# EAGLE board I2C_nRF (EAGLE 8.5.2)
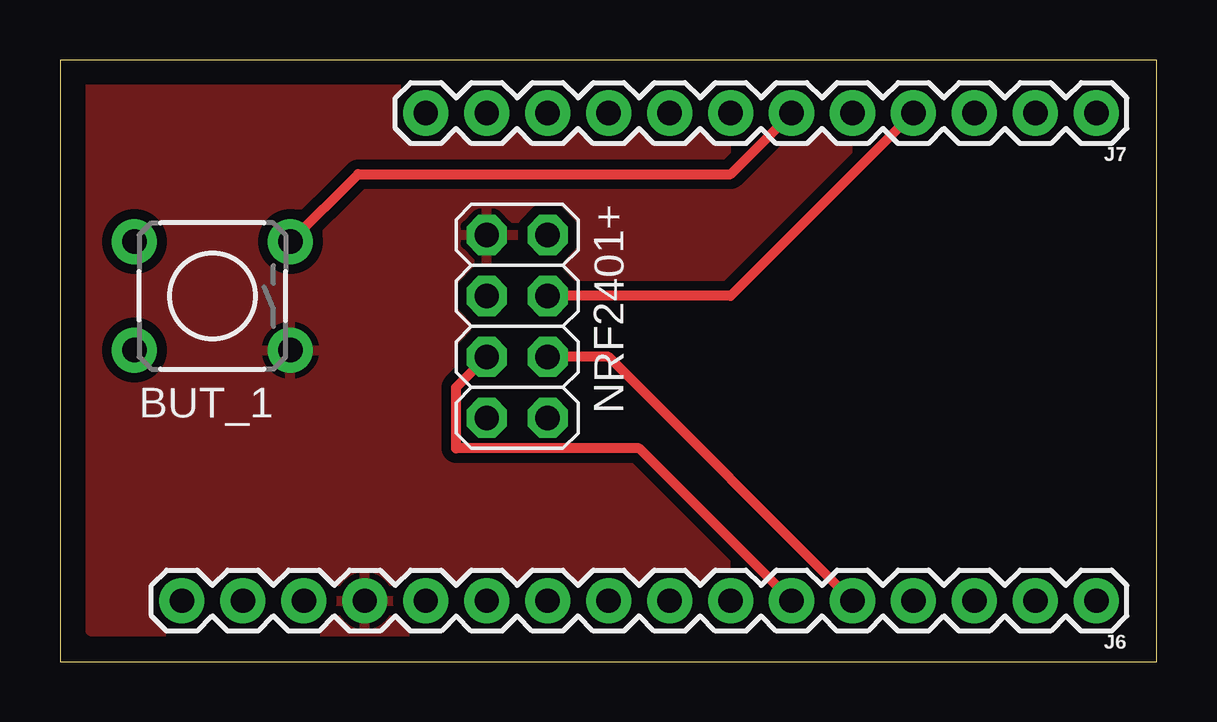
[diagram p0: board, top side]
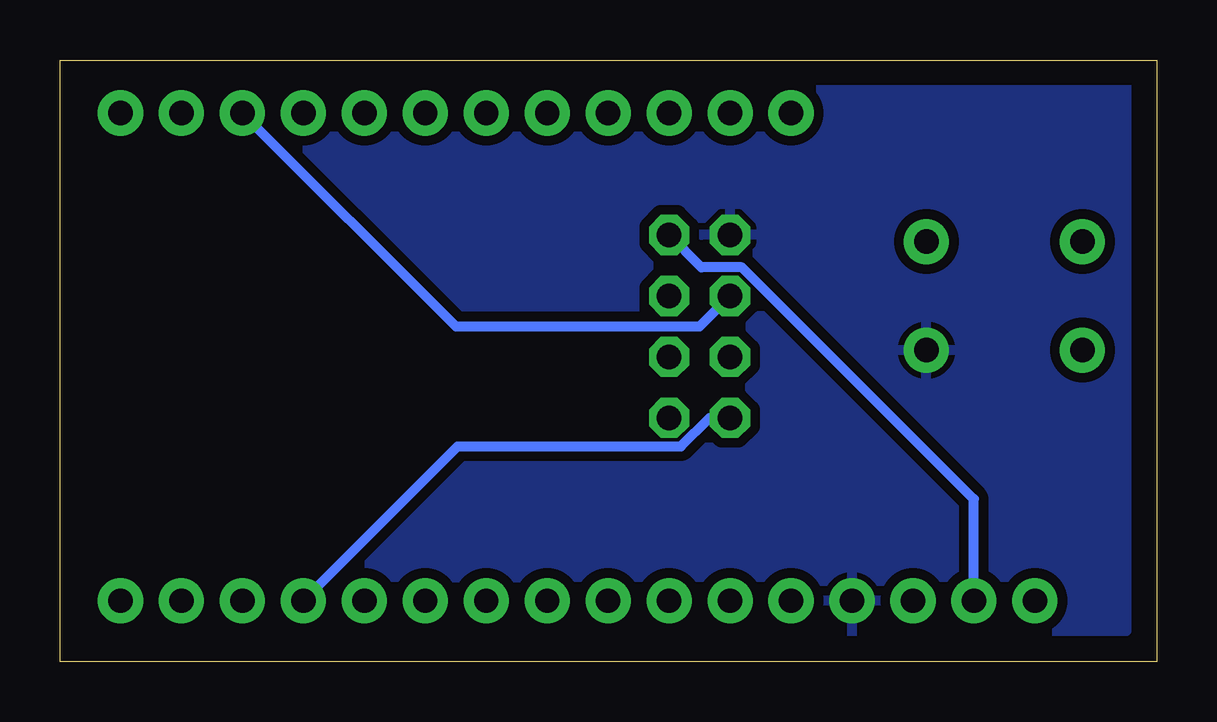
[diagram p1: board, bottom side, seen from below]

Size 45.7 x 25.07 mm. Coordinates in mm from the lower left corner, seen from the top.
Outline: 0,0 45.7,0 45.7,25.07 0,25.07 0,0
Copper layers (1*16): Top 0.035mm / dielectric 1.5mm / Bottom 0.035mm
Design rules "default": minimum track width 6mil, minimum drill 0.35mm, track to track 6mil, track to pad 6mil, pad to pad 6mil, via to via 6mil, smd to smd 6mil, copper to edge 40mil, drill to drill 6mil, minimum pad ring 10mil, minimum via ring 8mil, stop-mask expansion 4mil, vias tented up to drill 0mil, thermal gap 10mil
Net classes: 0 default: width 0.406 mm; 1 GND: width 0.61 mm

## Footprints (pad centres in the part's own frame; a part is rotated, then mirrored left to right if it is on the bottom)
TACTILE-PTH = drill 1.016 pad 1.88: 1 -3.251,2.261; 2 3.251,2.261; 3 -3.251,-2.261; 4 3.251,-2.261
1X16 = drill 1.016 pad 1.88: 1 0,0; 2 2.54,0; 3 5.08,0; 4 7.62,0; 5 10.16,0; 6 12.7,0; 7 15.24,0; 8 17.78,0; 9 20.32,0; 10 22.86,0; 11 25.4,0; 12 27.94,0; 13 30.48,0; 14 33.02,0; 15 35.56,0; 16 38.1,0
1X12 = drill 1.016 pad 1.88: 1 0,0; 2 2.54,0; 3 5.08,0; 4 7.62,0; 5 10.16,0; 6 12.7,0; 7 15.24,0; 8 17.78,0; 9 20.32,0; 10 22.86,0; 11 25.4,0; 12 27.94,0
2X04 = drill 1.016 pad 1.676 octagon: 1 -3.81,-1.27; 2 -3.81,1.27; 3 -1.27,-1.27; 4 -1.27,1.27; 5 1.27,-1.27; 6 1.27,1.27; 7 3.81,-1.27; 8 3.81,1.27

## Placement (x,y rotation side)
BUT_1  [TACTILE-PTH]  6.35,15.24 180 top
FRAME1  FRAME-LETTER  [CREATIVE_COMMONS]  -91.44,8.89 0 top  (outside the outline)
J6  [1X16]  43.18,2.54 180 top
J7  [1X12]  43.18,22.86 180 top
NRF2401+  [2X04]  19.05,13.97 270 top

## Library data of the parts
BUT_1 = SparkFun-Retired
FRAME1 = SparkFun-Aesthetics
J6 J7 = SparkFun-Connectors
NRF2401+ = adafruit

## Nets
A0: J6.12
A1: J6.11
A2: J6.10
A3: J6.9
A4: J6.8
A5: J6.7
AREF: J6.14
BAT: J7.12
CHNL_SCAN: BUT_1.3 J7.6
D5: J7.3 NRF2401+.3
D6: J7.4 NRF2401+.4
D9: J7.5
D12: J7.8
D13: J7.9
EN: J7.11
GND: BUT_1.1 J6.13 NRF2401+.1
IRQ: NRF2401+.8
MISO: J6.4 NRF2401+.7
MOSI: J6.5 NRF2401+.6
MPU_INT: J7.7
RST: J6.16
RX: J6.3
SCK: J6.6 NRF2401+.5
SCL: J7.2
SDA: J7.1
SPEC: J6.1
TX: J6.2
USB: J7.10
VCC: J6.15 NRF2401+.2

## Tracks (layer width: path | path; a pad name or v marks a point on that pad's centre or on a via)
CHNL_SCAN
  Top 0.406: BUT_1.3 12.42,20.32 27.94,20.32 J7.6
D5
  Bottom 0.406: J7.3 29.21,13.97 19.05,13.97 NRF2401+.3
D6
  Top 0.406: J7.4 27.94,15.24 NRF2401+.4
GND
  pour Top (isolate 0.406): 1.27,24.13 1.27,1.27 44.45,1.27 44.45,24.13
  pour Bottom (isolate 0.406): 1.27,24.13 1.27,1.27 44.45,1.27 44.45,24.13
MISO
  Bottom 0.406: NRF2401+.7 18.63,10.16 19.83,8.97 29.13,8.97 J6.4
MOSI
  Top 0.406: J6.5 22.86,12.7 NRF2401+.6
SCK
  Top 0.406: J6.6 24.13,8.89 16.51,8.89 16.51,11.43 NRF2401+.5
VCC
  Bottom 0.406: NRF2401+.2 18.97,16.43 17.29,16.43 7.62,6.77 J6.15

## Text on the board
Notes: 0.8 in